# Altium PCB RECTIFIER ASSEMBLY PCB.PcbDoc
Units mm, origin at the board's own origin, x right, y up, seen from the top; angles counter-clockwise.
Board outline 120 x 84 mm, 2 copper layers (Top Layer, Bottom Layer); 8 components, 11 nets, 40 pads, 0 vias.
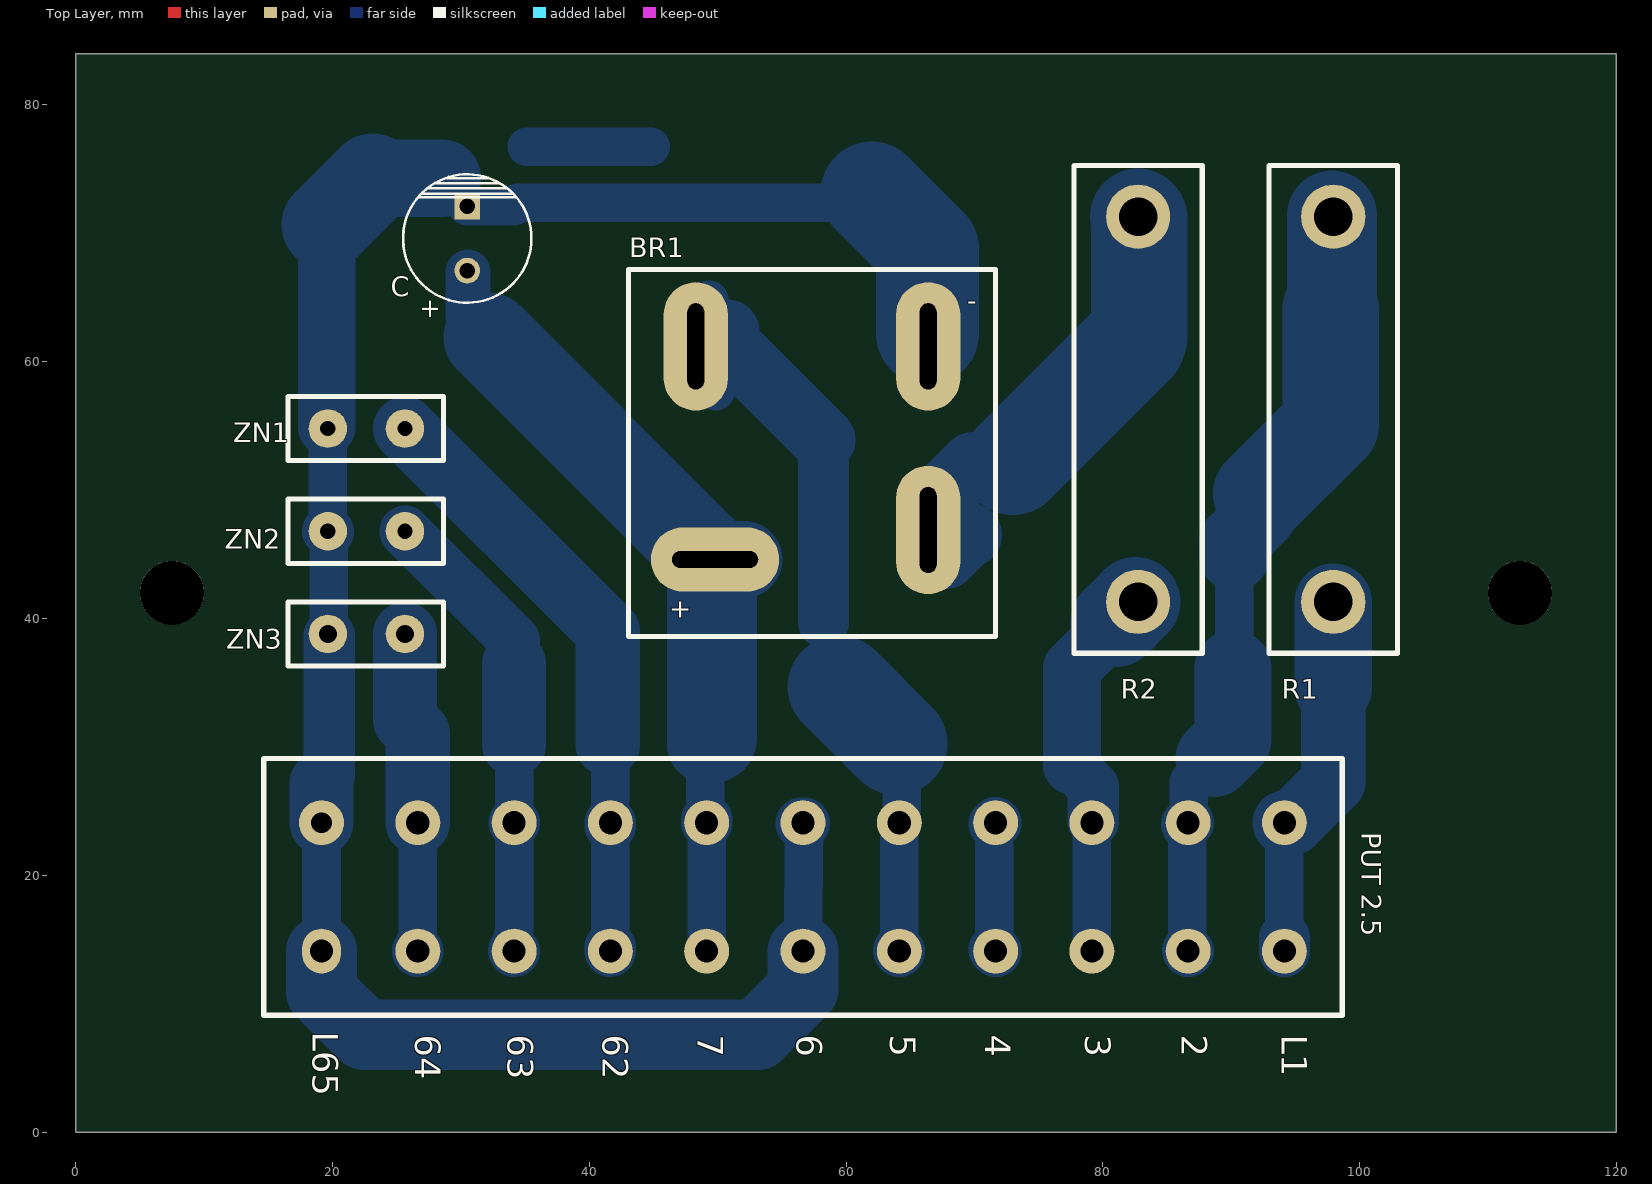
[diagram p0: Top Layer view]
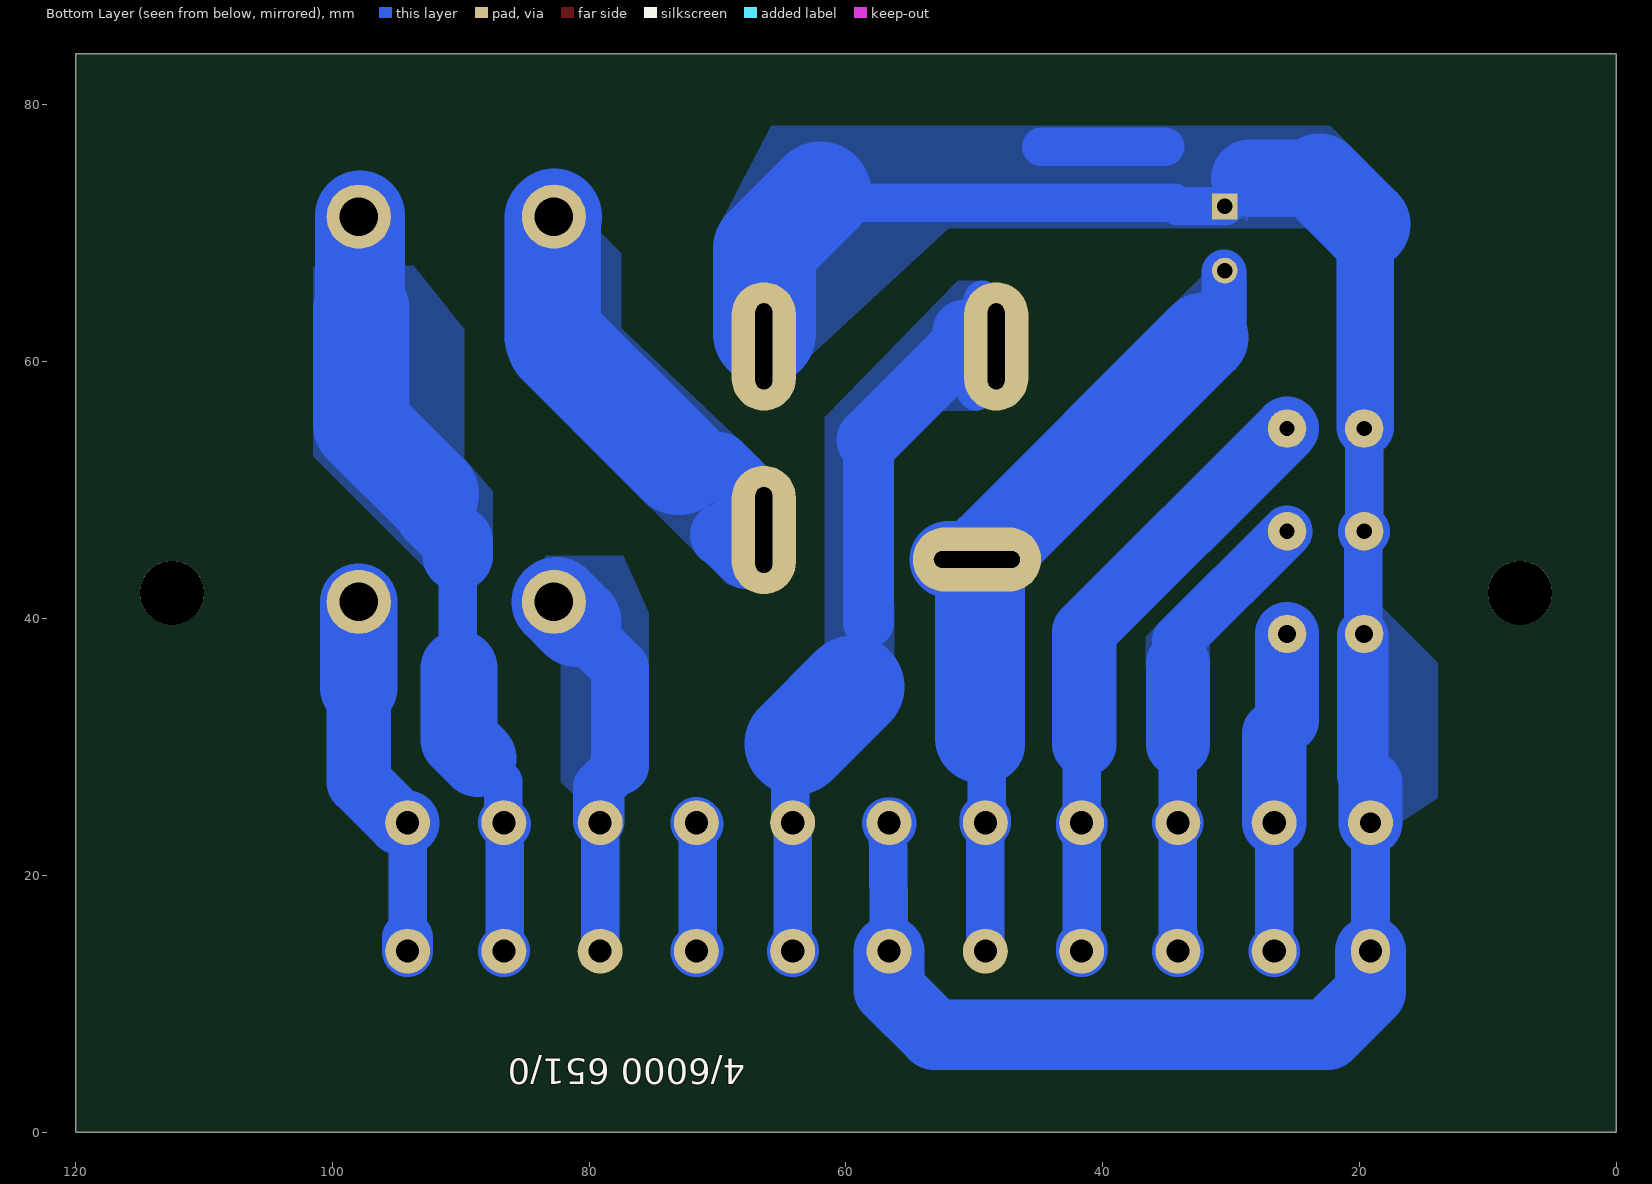
[diagram p1: Bottom Layer view, seen from below]

## Layer stack, top to bottom
Top Solder: solder mask 0.0102, Solder Resist, Dk 3.5
Top Layer: signal copper 0.0356
Dielectric 1: dielectric 0.32, FR-4, Dk 4.8
Bottom Layer: signal copper 0.0356
Bottom Solder: solder mask 0.0102, Solder Resist, Dk 3.5

## Board outline
0,0 0,84 120,84 120,0

## Design rules (kind name [scope] priority, off if disabled: settings)
Clearance [All vs InNet('6')] p1: gap=0 ignorepadtopadclearanceinfootprint=FALSE
PolygonConnect [All] p1: thpad.connectstyle=NoConnect thpad.reliefconductorwidth=0.254 thpad.reliefentries=4 thpad.polygonreliefangle="90 Angle" thpad.airgapwidth=0.254 smdpad.connectstyle=Relief smdpad.reliefconductorwidth=0.254 smdpad.reliefentries=4 smdpad.polygonreliefangle="90 Angle" smdpad.airgapwidth=0.254 via.connectstyle=Relief via.reliefconductorwidth=0.254 via.reliefentries=4 via.polygonreliefangle="90 Angle" via.airgapwidth=0.254
RoutingVias [All] p1: holewidth=0.711 width=1.27 viastyle="Through Hole" minholewidth=0.711 minwidth=1.27 maxholewidth=0.711 maxwidth=1.27
SolderMaskExpansion [All] p1: expansion=0.102 istentingtop=FALSE
Width [All] p1: maxlimit=15 minlimit=0.254 preferedwidth=3
30 further rules are at their usual default settings.

## Classes and differential pairs
component class "RECTIFIER ASSEMBLY": BR1 "PUT 2.5" R2 ZN1 ZN2 ZN3

## Components (designator, comment, footprint, x,y, rotation, side; value= is the part's Value field where it differs from the comment)
BR1 "BR 3510" "BRIDGE RECTIFIER 3510" 57.35,52.9 r0 top
C "Comment" "ELEC CAPACITOR (TH)" 30.5,69.6 r90 top
"PUT 2.5" "PUT CONNECTOR 2.5" "PUT CONNECTOR 2.5" 56.65,19.1 r180 top
R1 "WIRE WOUND FIXED RESISTOR1K/5W" "WIRE WOUND FIXED 1K/5W" 97.95,56.3 r90 top
R2 "RESISTOR 0.5E/10W" "WIRE WOUND RESISTOR 0E5/10W" 82.75,56.3 r90 top
ZN1 "VR 14/275" "MOV 14/130V"#1 22.65,54.8 r0 top
ZN2 "VR 14/275" "MOV 14/130V"#1 22.65,46.8 r0 top
ZN3 "VR 14/275" "MOV 14/130V"#2 22.65,38.8 r0 top

## Footprints (in the part's own frame and the unit in brackets; to place one, negate y for a bottom-side part, rotate by r counter-clockwise, add the part's x,y. Pads: shape width x height; smd on the part's side, far side on the other; paste and mask are expansions set on the pad)
"BRIDGE RECTIFIER 3510" [mm]
  rrect100% 10x5 hole 1.3 slot 6.7 at 0 deg: 1(-7.55,-8.3)
  rrect100% 5x10 hole 1.3 slot 6.7 at 90 deg: 2(9.05,-6) 3(9.05,8.3) 4(-9.05,8.3)
  silkscreen extent -14.3,-14.3 14.3,14.3
"ELEC CAPACITOR (TH)" [mm] "1000MFD/25V"
  round 2 hole 1.2: 1(-2.5,0)
  rect 2x2 hole 1.2: 2(2.5,0)
  silkscreen extent -5,-5 5,5
"MOV 14/130V"#1 [mm]
  round 3 hole 1.2: 1(-3,0) 2(3,0)
  silkscreen extent -6.1,-2.5 6,2.5
"MOV 14/130V"#2 [mm]
  round 3 hole 1.4: 1(-3,0) 2(3,0)
  silkscreen extent -6.1,-2.5 6,2.5
"PUT CONNECTOR 2.5" [mm] "ELMAX"
  round 3.5 hole 1.8: 1(-37.5,5) 2(-37.5,-5) 3(-30,5) 4(-30,-5) 5(-22.5,5) 6(-22.5,-5) 7(-15,5) 8(-15,-5) 9(-7.5,5) 10(-7.5,-5) 11(0,5) 12(0,-5) 13(7.5,5) 14(7.5,-5) 15(15,5) 16(15,-5) 17(22.5,5) 18(22.5,-5) 19(30,5) 20(30,-5)
  oval 3x3.5 hole 1.8: 21(37.5,5)
  round 3.5 hole 1.6: 22(37.5,-5)
  silkscreen extent -42,-10 42,10
"WIRE WOUND FIXED 1K/5W" [mm]
  round 5 hole 3: 1(-15,0) 2(15,0)
  silkscreen extent -19,-5 19,5
"WIRE WOUND RESISTOR 0E5/10W" [mm] "CEMENT POWER"
  round 5 hole 3: 1(-15,0) 2(15,0)
  silkscreen extent -19,-5 19,5

## Part data
BR1: library part "BRIDGE RECTIFIER 3510"
R2: library part "WIRE WOUND RESISTOR 0.5E/10W"
ZN1 ZN2 ZN3: library part "VARISTOR 14/275"

## Free pads (board coordinates)
  round 5 hole 5: 1(7.5,42) 2(112.5,42)

## Nets (pads, with @x,y where several pads share a name; then routed paths per layer and width w, separated by ;. In a path a pad name is that pad's centre, name@x,y a point inside that pad or via, vN(x,y) a via of type N, cw(c..) or ccw(c..) an arc to the next point about the centre after c; other vN are vias at no path point)
1: "PUT 2.5.1" "PUT 2.5.2" R1.1 | length 29.2
  Bottom Layer w3: 94.1,15.2 94.15,15.15 94.15,24.1
  Bottom Layer w4: 94.15,14.1 94.15,15.15
  Bottom Layer w5: 94.15,24.1 94.771,24.1 97.95,27.279 97.95,34.6
  Bottom Layer w6: 97.95,34.6 R1.1
2: "PUT 2.5.3" "PUT 2.5.4" R1.2 | length 62.2
  Bottom Layer w3: 86.65,14.1 86.595,14.155 86.595,24.045 86.65,24.1 86.705,24.155 86.705,27.343 88.462,29.1 88.65,29.1 ; 90.15,36.1 90.25,36.2 90.25,44.9 ; 92.35,48.1 92.35,49.7
  Bottom Layer w4: 86.54,23.99 86.65,24.1 ; 86.6,14.15 86.65,14.1
  Bottom Layer w5.5: 90.25,44.9 90.25,46 92.35,48.1
  Bottom Layer w6: 88.65,29.1 90.15,30.6 90.15,36.1
  Bottom Layer w7: 97.85,64.199 R1.2@97.85,71.4
  Bottom Layer w7.5: 92.35,49.7 97.75,55.1 97.75,64.099
3: "PUT 2.5.5" "PUT 2.5.6" R2.1 | length 32.3
  Bottom Layer w3: 79.15,14.1 79.15,24.1
  Bottom Layer w4: 77.6,28.55 79.25,26.9 79.25,24.2
  Bottom Layer w4.5: 77.6,28.55 77.6,36.15 R2.1
  Bottom Layer w5: R2.1@82.561,41.3 R2.1
  Bottom Layer w7: R2.1@80.985,39.724 R2.1@82.561,41.3
4: BR1.2 R2.2 | length 35
  Bottom Layer w3: 69.907,52.05 73.1,52.05
  Bottom Layer w5: BR1.2 66.4,46.15 67.75,44.8 69.45,46.5 69.65,46.5 ; BR1.2@67.65,49.793 69.907,52.05
  Bottom Layer w7.5: 82.45,61.5 82.85,61.9 82.85,71.2 R2.2
  Bottom Layer w8: 73,52.05 82.45,61.5
5: "PUT 2.5.7" "PUT 2.5.8" | length 9.9
  Bottom Layer w3: 71.55,14.35 71.55,24
  Bottom Layer w4: 71.55,24 71.65,24.1 ; 71.554,14.196 71.65,14.1
6: "PUT 2.5.9" "PUT 2.5.10" BR1.4 | length 54.2
  Bottom Layer w3: BR1.4@48.3,59.241 BR1.4@49.841,57.7 ; BR1.4 48.3,63.8 BR1.4@49.337,64.837 ; 63.911,30.239 64.35,29.8 64.35,24.55 64.15,24.35 64.15,24.1 64.15,14.9 ; 64.1,14.15 64.1,14.35
  Bottom Layer w4: 58.25,39.7 58.25,53.9 ; 64.1,14.15 64.15,14.1
  Bottom Layer w5: BR1.4@50.75,62.35 50.75,61.4 58.25,53.9
  Bottom Layer w8: 59.45,34.7 63.911,30.239
7: "PUT 2.5.11" "PUT 2.5.12" "PUT 2.5.21" "PUT 2.5.22" BR1.3 C.2 ZN1.1 ZN2.1 ZN3.1 | length 168.8
  Bottom Layer w3: 19.15,14.1 19.15,24.1 ; 19.15,27.2 19.75,27.8 ; ZN1.1@19.55,54.9 ZN1.1 ZN2.1 ; ZN2.1@19.7,46.75 19.7,38.85 ZN3.1 ZN3.1@19.75,38.7 ; C.2 34.15,72.1 34.45,72.4 61.25,72.4 62,73.15 ; 56.65,14.1 56.75,24.05
  Bottom Layer w4: ZN2.1 ZN2.1@19.7,46.75 ; 19.75,27.8 ZN3.1@19.75,38.7 ; 56.5,24.05 56.75,24.05
  Bottom Layer w4.5: ZN1.1@19.55,54.9 19.55,70.7
  Bottom Layer w5: 19.15,24.1 19.15,27.2
  Bottom Layer w5.5: 19.15,14.1 19.15,10.929 22.479,7.6 53.121,7.6 56.65,11.129 56.65,14.1
  Bottom Layer w6: 23.145,74.295 28.555,74.295
  Bottom Layer w7: 19.55,70.7 23.145,74.295
  Bottom Layer w8: 62,73.15 66.35,68.8 BR1.3@66.35,62.2
8: "PUT 2.5.13" "PUT 2.5.14" BR1.1 C.1 | length 62
  Bottom Layer w3: 30.55,63.5 32.15,61.9 ; 49.05,30.2 49.05,24.45 49.15,24.35 ; 49.15,14.1 49.15,24.1
  Bottom Layer w3.5: 30.55,63.5 C.1@30.55,67
  Bottom Layer w4: 49.15,24.1 49.15,24.35
  Bottom Layer w6: 49.05,30.2 49.55,30.7 ; BR1.1 BR1.1@52.05,44.6
  Bottom Layer w7: 32.15,61.9 BR1.1@48.8,45.25 ; 49.55,30.7 BR1.1@49.55,44.267
9: "PUT 2.5.15" "PUT 2.5.16" ZN1.2 | length 47.3
  Bottom Layer w3: 40.95,29.8 41.65,29.1 41.65,24.1 ; 41.65,14.4 41.65,23.85 41.8,23.7
  Bottom Layer w4: 41.65,14.1 41.65,14.4 ; 41.65,23.85 41.65,24.1
  Bottom Layer w5: ZN1.2 41.45,39 41.45,30.2
10: "PUT 2.5.17" "PUT 2.5.18" ZN2.2 | length 34
  Bottom Layer w3: 34.1,14.95 34.1,15.4 ; 34.15,15.35 34.15,24.1 ; 34.15,30.2 34.15,24.1 ; 34.35,23.9 34.15,24.1
  Bottom Layer w4: ZN2.2 34.15,38.3 ; 34.1,14.15 34.15,14.1
  Bottom Layer w5: 34.15,30.2 34.15,36.5
11: "PUT 2.5.19" "PUT 2.5.20" ZN3.2 | length 24.1
  Bottom Layer w3: 25.65,32.075 26.65,31.075 ; 26.65,15.1 26.65,24.1
  Bottom Layer w4: 26.625,14.125 26.65,14.1
  Bottom Layer w5: 25.65,32.075 ZN3.2 ; 26.65,24.1 26.65,31.075
copper on no net: | length 9.7
  Bottom Layer w3: 35.15,76.75 44.8,76.75

## Polygon pours and split planes (outlines as drawn)
7 on Bottom Layer "7_L02_P022" (solid, pour order 22): 28.45,71.95 30.7,71.95 31.8,70.85 28.8,70.85 28.45,71.2
7 on Bottom Layer "7_L02_P021" (solid, pour order 21): 28.7,72.2 29.7,71.2 28.95,71.2 28.75,71 28.7,71.05
7 on Bottom Layer "7_L02_P003" (solid, pour order 3): 65.815,78.4 22.302,78.4 16.976,72.978 17.188,70.4 69.985,70.4
3 on Bottom Layer "3_L02_P023" (solid, pour order 23): 81.25,26.3 82.2,27.25 82.2,28.55 80.45,28.55 80.45,27.1
8 on Bottom Layer "8_L02_P017" (solid, pour order 17): 32.25,66.8 32.25,66.7 34.25,64.7 34.15,64.6 31.65,64.6 31.65,66.2
8 on Bottom Layer "8_L02_P016" (solid, pour order 16): 29.15,67.3 28.8,66.75 28.8,62.2 29.35,62.2 29.15,62.4
2 on Bottom Layer "2_L02_P020" (solid, pour order 20): 91.7,42.85 101.5,52.65 101.5,56.133 89.959,44.591
10 on Bottom Layer "10_L02_P019" (solid, pour order 19): 31.65,38.2 31.65,35.6 31.95,35.6 35.8,39.45 36.65,38.6 36.65,36.3 33.55,36.3
7 on Bottom Layer "7_L02_P018" (solid, pour order 18): 63.05,60.2 51.35,71 61.55,71 63.05,69.5
7 on Bottom Layer "7_L02_P015" (solid, pour order 15): 18.15,40.8 13.9,36.55 13.9,26 16.675,24.225 19.25,26.8 19.25,41.9
6 on Bottom Layer "6_L02_P014" (solid, pour order 14): 56.25,41 56.25,34 59.15,34 59.25,33.9 59.85,34.5 59.85,41
6 on Bottom Layer "6_L02_P013" (solid, pour order 13): 61.65,54.7 61.65,34.7 59.05,37.3 59.05,54.7
6 on Bottom Layer "6_L02_P012" (solid, pour order 12): 61.65,55.662 51.289,66.3 46.084,66.3 46.084,56.2 53.25,56.2 59.65,49.8 61.65,52.569
4 on Bottom Layer "4_L02_P011" (solid, pour order 11): 81.429,54.829 69.226,42.626 65.566,42.084 64.525,43.125 66.495,52.225
4 on Bottom Layer "4_L02_P010" (solid, pour order 10): 80.25,71.2 77.5,68.45 77.5,62.597 65.947,51.7 77.05,51.7 82.15,56.8 82.15,63.8 82.15,70.2 81.25,70.2
2 on Bottom Layer "2_L02_P009" (solid, pour order 9): 89.95,52.7 87.5,49.916 87.5,44.5 92.102,44.5
2 on Bottom Layer "2_L02_P008" (solid, pour order 8): 93.71,67.5 89.75,62.55 89.75,48.788 101.492,60.293 101.492,67.4
3 on Bottom Layer "3_L02_P006" (solid, pour order 6): 77.335,44.9 75.35,40.45 75.35,28.3 81.9,28.35 82.2,28.55 82.2,37.5 84.662,40.096 83.379,44.9
no net on Bottom Layer "NONET_L02_P002" (solid, pour order 2): 61.5,72.6
no net on Bottom Layer "NONET_L02_P001" (solid, pour order 1): 26.9,64.8

## Silkscreen, mask and mechanical layers (free items; w line width, h text height)
Top Overlay:
  text "L65" at 18.45,7.8 h2 r270
  text "64" at 26.45,7.6 h2 r270
  text "63" at 33.65,7.6 h2 r270
  text "62" at 41.05,7.6 h2 r270
  text "7" at 48.45,7.6 h2 r270
  text "6" at 56.15,7.6 h2 r270
  text "5" at 63.45,7.6 h2 r270
  text "4" at 70.85,7.6 h2 r270
  text "3" at 78.65,7.6 h2 r270
  text "2" at 86.15,7.6 h2 r270
  text "L1" at 93.95,7.6 h2 r270
Bottom Overlay:
  text "4/6000 651/0" at 67.85,5.7 h2 r180
OUTLINE:
  the board outline again, w0.4
Drill Drawing:
  circle w0.254: c-22.794,121.102 r0.847
  lines w0.254: -23.641,116.445 -23.641,116.868 -23.217,117.292 -23.641,117.715 -23.641,118.138 -23.217,118.138 -22.794,117.715 -22.371,118.138 -21.947,118.138 -21.947,117.715 -22.371,117.292 -21.947,116.868 -21.947,116.445 -22.371,116.445 -22.794,116.868 -23.217,116.445 -23.641,116.445 ; -23.641,125.758 -21.947,125.758 -22.794,124.065 -23.641,125.758 ; -23.641,128.722 -22.794,127.875 -21.947,128.722 -22.794,129.568 -23.641,128.722 ; -23.641,132.108 -23.217,132.108 -23.217,131.685 -22.371,131.685 -22.371,132.108 -21.947,132.108 -21.947,132.955 -22.371,132.955 -22.371,133.378 -23.217,133.378 -23.217,132.955 -23.641,132.955 -23.641,132.108 ; -23.641,135.495 -21.947,135.495 -21.947,137.188 -23.641,137.188 -23.641,135.495 ; -23.641,139.305 -22.794,139.728 -21.947,139.305 -22.371,140.152 -21.947,140.998 -22.794,140.575 -23.641,140.998 -23.217,140.152 -23.641,139.305
  lines w0.381: -25.16,115.302 107.038,115.302 ; -25.16,141.972 107.038,141.972 ; -11.167,111.492 -11.167,145.782 ; 2.545,111.492 2.545,145.782 ; 31.747,111.492 31.747,145.782 ; 44.596,111.492 44.596,145.782 ; 63.234,111.492 63.234,145.782 ; 78.217,111.492 78.217,145.782 ; -25.16,111.492 107.038,111.492 107.038,145.782 -25.16,145.782 -25.16,111.492
  text "Symbol" at -22.874,143.115 h1.83
  text "Count" at -10.024,143.115 h1.83
  text "Hole Size" at 3.688,143.115 h1.83
  text "Plated" at 32.89,143.115 h1.83
  text "Hole Type" at 45.739,143.115 h1.83
  text "Via/Pad" at 64.377,143.115 h1.83
  text "Pad Shape" at 79.36,143.115 h1.83
  text "1" at -10.024,139.305 h1.52
  text "1.600mm (62.99mil)" at 3.688,139.305 h1.52
  text "PTH" at 32.89,139.305 h1.52
  text "Round" at 45.739,139.305 h1.52
  text "Pad" at 64.377,139.305 h1.52
  text "Rounded" at 79.36,139.305 h1.52
  text "2" at -10.024,135.495 h1.52
  text "1.400mm (55.12mil)" at 3.688,135.495 h1.52
  text "PTH" at 32.89,135.495 h1.52
  text "Round" at 45.739,135.495 h1.52
  text "Pad" at 64.377,135.495 h1.52
  text "Rounded" at 79.36,135.495 h1.52
  text "2" at -10.024,131.685 h1.52
  text "5.000mm (196.85mil)" at 3.688,131.685 h1.52
  text "PTH" at 32.89,131.685 h1.52
  text "Round" at 45.739,131.685 h1.52
  text "Pad" at 64.377,131.685 h1.52
  text "Rounded" at 79.36,131.685 h1.52
  text "4" at -10.024,127.875 h1.52
  text "1.300mm (51.18mil)" at 3.688,127.875 h1.52
  text "PTH" at 32.89,127.875 h1.52
  text "Slot" at 45.739,127.875 h1.52
  text "Pad" at 64.377,127.875 h1.52
  text "Rounded Rectangle" at 79.36,127.875 h1.52
  text "4" at -10.024,124.065 h1.52
  text "3.000mm (118.11mil)" at 3.688,124.065 h1.52
  text "PTH" at 32.89,124.065 h1.52
  text "Round" at 45.739,124.065 h1.52
  text "Pad" at 64.377,124.065 h1.52
  text "Rounded" at 79.36,124.065 h1.52
  text "6" at -10.024,120.255 h1.52
  text "1.200mm (47.24mil)" at 3.688,120.255 h1.52
  text "PTH" at 32.89,120.255 h1.52
  text "Round" at 45.739,120.255 h1.52
  text "Pad" at 64.377,120.255 h1.52
  text "(Mixed)" at 79.36,120.255 h1.52
  text "21" at -10.024,116.445 h1.52
  text "1.800mm (70.87mil)" at 3.688,116.445 h1.52
  text "PTH" at 32.89,116.445 h1.52
  text "Round" at 45.739,116.445 h1.52
  text "Pad" at 64.377,116.445 h1.52
  text "Rounded" at 79.36,116.445 h1.52
  text "40 Total" at -10.024,112.635 h1.52
  text "Slot definitions :" at -22.874,108.953 h1.52
  text "Routed Path Length" at 3.357,108.953 h1.52
  text "= Calculated from tool start centre position to tool end centre position." at 31.365,108.953 h1.52
  text "Hole Length" at 3.357,106.413 h1.52
  text "= Routed Path Length + Tool Size = Slot length as defined in the PCB layout" at 20.954,106.413 h1.52

## Dimensions
112.5,42 to 120,0 on DIMENSSION
112.5,42 to 120,0 on DIMENSSION
7.5,42 to 112.5,42 on DIMENSSION
0,0 to 120,0 on DIMENSSION
0,0 to 0,84 on DIMENSSION

## Text inside footprints (layer, text, board x,y; h text height)
BR1: Top Overlay "-" at 69.45,64.05 h1.5; Top Overlay "+" at 46.25,40.05 h1.5
C: Top Overlay "+" at 28.25,63.25 h1.5 r90